# Altium PCB LKS_Motor_0331.PcbDoc (part 2 of 3)
Units mm, origin at the board's own origin, x right, y up, seen from the top; angles counter-clockwise.
Board outline 117 x 10 mm, 2 copper layers (Top Layer, Bottom Layer); 110 components, 71 nets, 323 pads, 187 vias.
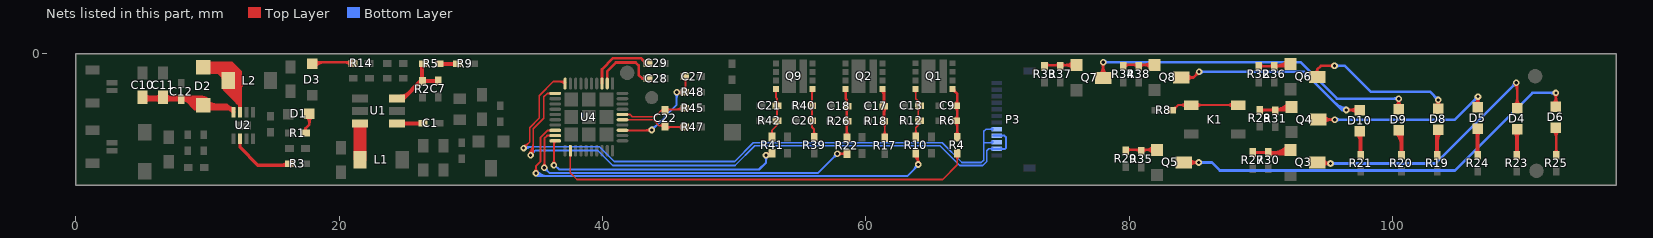
[diagram p2: the nets of this part, all layers, seen from the top]

## Via types
v1: diameter 0.5, hole 0.25, Top Layer to Bottom Layer, 185 vias
v2: diameter 0.7, hole 0.4, Top Layer to Bottom Layer, 2 vias

## Nets (pads, with @x,y where several pads share a name; then routed paths per layer and width w, separated by ;. In a path a pad name is that pad's centre, name@x,y a point inside that pad or via, vN(x,y) a via of type N, cw(c..) or ccw(c..) an arc to the next point about the centre after c; other vN are vias at no path point) (continued)
HO3: R4.2 U4.22 | length 33.5
  Top Layer w0.127: U4.22@37.527,-7.731 cw(c37.431,-7.827) 37.567,-7.827 cw(c37.703,-7.827) U4.22@37.607,-7.731 ; U4.22@37.567,-7.361 37.567,-9.043 38.075,-9.55 65.837,-9.55 66.953,-8.434 R4.2@66.953,-7.849 ; R4.2@66.818,-7.761 cw(c66.493,-8.086) 66.953,-8.086 cw(c67.413,-8.086) R4.2@67.088,-7.761
  Top Layer w0.15: R4.2@66.953,-7.849 R4.2@66.953,-7.626
LH_OUT_01: P3.8 P3.10 U4.10 | length 50.4
  Top Layer w0.127: v1(34.011,-7.163) 34.468,-6.706 34.468,-5.613 35.204,-4.877 35.204,-3.175 36.271,-2.108 U4.10@37.167,-2.108 ; v1@34.011,-6.976 ccw(c34.011,-6.526) 34.329,-6.844 ccw(c34.647,-7.163) v1@34.197,-7.163 ; 36.663,-2.108 cw(c36.663,-2.765) U4.10@37.127,-2.301 ; 36.969,-2.108 cw(c36.969,-2.458) U4.10@37.217,-2.211
  Bottom Layer w0.127: v1(34.011,-7.163) 34.108,-7.065 39.78,-7.065 40.894,-8.179 50.038,-8.179 51.46,-6.756 65.811,-6.756 67.31,-8.255 68.783,-8.255 68.961,-8.077 68.961,-6.756 ; v1@34.053,-7.205 cw(c34.39,-7.542) 34.39,-7.065 ; v1@34.142,-7.295 cw(c34.697,-7.849) 34.697,-7.065 ; 69.381,-6.756 ccw(c69.381,-6.392) P3.10@69.638,-6.65 ; P3.8@69.638,-5.793 ccw(c69.465,-5.967) 69.465,-5.722 ccw(c69.465,-5.476) P3.8@69.638,-5.65 ; P3.10@69.647,-6.722 69.612,-6.756 68.961,-6.756 ; P3.8@69.647,-5.722 69.132,-5.722 68.961,-5.893 68.961,-6.756
LH_OUT_02: P3.9 P3.11 U4.11 | length 50.5
  Top Layer w0.127: v1@34.412,-7.564 ccw(c33.634,-6.786) 34.734,-6.786 ; v1@34.502,-7.654 ccw(c33.94,-7.093) 34.734,-7.093 ; v1(34.544,-7.696) 34.734,-7.506 34.734,-5.702 35.547,-4.889 35.547,-3.264 35.801,-3.011 U4.11@36.417,-3.011 ; v1@34.592,-7.744 ccw(c34.247,-7.399) 34.734,-7.399 ; U4.11@36.047,-3.051 ccw(c35.951,-3.147) 35.951,-3.011 ccw(c35.951,-2.874) U4.11@36.047,-2.971
  Bottom Layer w0.127: v1(34.544,-7.696) 34.9,-7.341 39.649,-7.341 40.792,-8.484 50.063,-8.484 51.562,-6.985 65.634,-6.985 67.132,-8.484 68.885,-8.484 69.19,-8.179 69.19,-7.374 69.342,-7.222 P3.11@69.647,-7.222 ; v1@34.544,-7.51 ccw(c34.544,-7.059) 34.862,-7.378 ccw(c35.181,-7.696) v1@34.73,-7.696 ; P3.11@69.638,-7.293 ccw(c69.465,-7.467) 69.465,-7.222 ccw(c69.465,-6.976) P3.11@69.638,-7.15
  Bottom Layer w0.15: P3.11@69.647,-7.222 P3.11@69.952,-7.222 70.579,-7.222 70.637,-7.163 70.637,-6.325 70.534,-6.222 P3.9@69.952,-6.222 P3.9@69.647,-6.222 ; P3.11@70.257,-7.285 cw(c70.41,-7.439) 70.41,-7.222 cw(c70.41,-7.004) P3.11@70.257,-7.158 ; P3.9@70.257,-6.285 cw(c70.41,-6.439) 70.41,-6.222 cw(c70.41,-6.004) P3.9@70.257,-6.158
LO1: R41.2 U4.20 | length 22.4
  Top Layer w0.15: v1@36.192,-8.341 ccw(c35.893,-8.042) 36.315,-8.042 ccw(c36.738,-8.042) v1@36.439,-8.341 ; v1(36.315,-8.465) 36.315,-6.712 U4.20@36.417,-6.611 ; 36.315,-6.965 cw(c36.771,-6.965) U4.20@36.449,-6.642 ; v1@52.549,-7.82 cw(c52.848,-8.119) 52.848,-7.696 cw(c52.848,-7.274) v1@52.549,-7.572 ; R41.2@52.635,-7.696 cw(c52.635,-7.868) R41.2@52.756,-7.747 ; R41.2@52.73,-7.526 cw(c52.426,-7.338) v1(52.426,-7.696) R41.2@53.01,-7.696
  Bottom Layer w0.15: v1(36.315,-8.465) 36.379,-8.465 36.703,-8.788 51.892,-8.788 52.426,-8.255 v1(52.426,-7.696) ; v1@52.302,-7.82 cw(c52.003,-8.119) 52.426,-8.119 cw(c52.848,-8.119) v1@52.549,-7.82
LO2: R22.2 U4.19 | length 30.2
  Top Layer w0.15: v1@35.462,-8.538 ccw(c35.163,-8.239) 35.585,-8.239 ccw(c36.008,-8.239) v1@35.709,-8.538 ; v1(35.585,-8.661) 35.585,-6.426 35.801,-6.211 U4.19@36.417,-6.211 ; v1(57.836,-7.595) 58.561,-7.595 R22.2@58.571,-7.585 ; v1@57.96,-7.718 cw(c58.258,-8.017) 58.258,-7.595 cw(c58.258,-7.172) v1@57.96,-7.471 ; 58.115,-7.595 ccw(c58.115,-7.129) R22.2@58.444,-7.458 ; 58.162,-7.595 cw(c58.162,-7.993) R22.2@58.444,-7.711
  Bottom Layer w0.15: v1@35.585,-8.836 cw(c35.585,-9.259) 35.884,-8.96 cw(c36.183,-8.661) v1@35.76,-8.661 ; v1(35.585,-8.661) 35.966,-9.042 56.388,-9.042 v1(57.836,-7.595) ; v1@57.661,-7.595 cw(c57.238,-7.595) 57.537,-7.893 cw(c57.836,-8.192) v1@57.836,-7.77
LO3: R10.2 U4.18 | length 40.4
  Top Layer w0.15: v1@34.827,-8.944 ccw(c34.528,-8.645) 34.95,-8.645 ccw(c35.373,-8.645) v1@35.074,-8.944 ; v1@34.925,-9.042 v1(34.95,-9.068) 34.95,-8.534 35.306,-8.179 35.306,-7.239 ; 35.306,-7.772 35.306,-7.239 ; U4.18@36.417,-5.811 35.839,-5.811 35.306,-6.344 35.306,-7.239 ; R10.2@63.684,-7.752 cw(c63.07,-8.427) v1@63.983,-8.427 ; R10.2@63.785,-7.641 cw(c63.379,-8.088) 63.983,-8.088 ; v1@63.859,-8.284 ccw(c63.56,-7.985) 63.983,-7.985 ccw(c64.405,-7.985) v1@64.106,-8.284 ; v1(63.983,-8.407) R10.2@63.983,-7.544
  Bottom Layer w0.15: v1@34.862,-9.156 ccw(c35.201,-8.818) 35.201,-9.296 ; v1(34.95,-9.068) 34.95,-9.093 35.154,-9.296 63.144,-9.296 63.983,-8.458 v1(63.983,-8.407) ; v1@34.968,-9.05 ccw(c35.563,-8.456) 35.563,-9.296 ; v1@35.074,-8.944 ccw(c35.925,-8.093) 35.925,-9.296 ; 63.648,-8.793 ccw(c63.262,-8.407) v1@63.808,-8.407 ; 63.771,-8.67 cw(c63.983,-8.882) v1@63.983,-8.582
NetC1_2: C1.2 U1.1 | length 2.9
  Top Layer w0.3: U1.1@24.311,-5.293 U1.1@24.387,-5.293 C1.2@26.38,-5.293 ; U1.1@24.793,-5.399 cw(c25.049,-5.656) 25.049,-5.293 cw(c25.049,-4.931) U1.1@24.793,-5.187 ; 26.013,-5.293 ccw(c26.013,-5.007) C1.2@26.215,-5.21
NetC7_1: C7.1 R2.2 R5.1 U1.3 | length 7.3
  Top Layer w0.3: U1.3@24.311,-3.393 24.877,-3.393 26.187,-2.083 R2.2@26.34,-2.083 ; U1.3@24.687,-3.243 ccw(c24.687,-2.423) 25.267,-3.003 ; 25.772,-2.498 cw(c26.34,-3.066) R2.2@26.34,-2.263 ; 26.289,-1.633 ccw(c26.714,-1.633) R2.2@26.413,-1.933 ; 26.289,-1.074 cw(c26.627,-1.074) R5.1@26.388,-0.836 ; R5.1@26.289,-0.762 26.289,-2.032 R2.2@26.34,-2.083 ; R2.2@26.413,-2.156 cw(c26.652,-2.395) 26.652,-2.057 ; C7.1@27.534,-2.057 26.365,-2.057 R2.2@26.34,-2.083
NetC9_2: C9.2 Q1.1 R4.1 R6.1 | length 7.2
  Top Layer w0.2: Q1.1@66.577,-2.672 66.953,-3.048 R4.1@66.953,-6.331 ; Q1.1@66.589,-2.788 cw(c66.589,-3.037) Q1.1@66.765,-2.861 ; Q1.1@66.705,-2.672 ccw(c67.016,-2.672) 66.796,-2.891 ; R6.1@66.798,-5.195 cw(c66.424,-5.569) 66.953,-5.569 ; R6.1@66.798,-4.977 ccw(c66.424,-4.603) 66.953,-4.603 ; C9.2@66.798,-4.052 cw(c66.424,-4.426) 66.953,-4.426 ; C9.2@66.798,-3.834 ccw(c66.424,-3.46) 66.953,-3.46 ; R4.1@66.844,-6.146 ccw(c66.581,-5.883) 66.953,-5.883 ccw(c67.325,-5.883) R4.1@67.062,-6.146 ; R4.1@66.877,-6.356 R4.1@66.877,-6.331 ; 66.953,-5.347 cw(c67.168,-5.347) R6.1@67.016,-5.195 ; 66.953,-4.826 ccw(c67.168,-4.826) R6.1@67.016,-4.977 ; 66.953,-4.204 cw(c67.168,-4.204) C9.2@67.016,-4.052 ; 66.953,-3.683 ccw(c67.168,-3.683) C9.2@67.016,-3.834
NetC10_2: C10.2 C11.2 C12.2 D2.2 U2.4 | length 30.2
  Top Layer w0.3: C10.2@5.243,-3.605 cw(c5.546,-3.907) 5.546,-3.48 ; C10.2@5.243,-3.278 ccw(c5.73,-2.792) 5.73,-3.48 ; C10.2@5.243,-3.151 ccw(c5.638,-2.757) 5.638,-3.315 ccw(c5.638,-3.872) 5.243,-3.478 5.245,-3.48 8.407,-3.48 9.07,-4.142 11.682,-4.142 ; C10.2@5.258,-3.315 6.833,-3.315 9.383,-3.315 9.976,-3.908 11.448,-3.908 11.682,-4.142 ; 5.98,-3.48 ccw(c5.98,-2.792) C11.2@6.466,-3.278 ; 6.164,-3.48 cw(c6.164,-3.907) C11.2@6.466,-3.605 ; C11.2@6.466,-3.478 ccw(c6.072,-3.872) 6.072,-3.315 ccw(c6.072,-2.757) C11.2@6.466,-3.151 ; C11.2@6.793,-3.605 cw(c7.095,-3.907) 7.095,-3.48 ; C11.2@6.793,-3.478 cw(c7.187,-3.872) 7.187,-3.315 cw(c7.187,-2.757) C11.2@6.793,-3.151 ; C11.2@6.793,-3.278 ccw(c7.279,-2.792) 7.279,-3.48 ; 7.299,-3.315 cw(c7.299,-6.306) D2.2@9.414,-4.191 ; 7.535,-3.315 cw(c7.535,-3.869) C12.2@7.927,-3.477 ; C12.2@8.023,-3.315 cw(c8.023,-5.581) D2.2@9.626,-3.979 ; C12.2@8.075,-3.477 cw(c8.467,-3.869) 8.467,-3.315 ; 8.748,-3.315 cw(c8.748,-4.857) D2.2@9.838,-3.766 ; 9.472,-3.315 cw(c9.472,-4.133) D2.2@10.05,-3.554 ; D2.2@9.767,-3.837 ccw(c10.504,-3.101) 10.504,-4.142 ; D2.2@9.98,-4.191 cw(c10.662,-4.874) 10.662,-3.908 cw(c10.662,-2.942) 9.98,-3.625 ccw(c11.228,-2.376) 11.228,-4.142 ; 11.573,-4.033 ccw(c11.944,-3.662) U2.4@11.975,-4.186 ; U2.4@11.975,-4.436 11.682,-4.142
NetC13_2: C13.2 Q1.8 R10.1 R12.1 | length 7.4
  Top Layer w0.127: R10.1@63.67,-6.114 ccw(c63.345,-5.788) 63.805,-5.788 ccw(c64.265,-5.788) R10.1@63.94,-6.114 ; Q1.8@63.685,-2.779 cw(c63.425,-3.04) 63.793,-3.04 cw(c64.161,-3.04) Q1.8@63.901,-2.779 ; Q1.8@63.793,-2.672 63.793,-3.417 63.983,-3.607 ; R10.1@63.805,-6.325 63.805,-5.613 63.983,-5.436 ; R12.1@63.873,-4.952 ccw(c63.609,-4.688) 63.983,-4.688 ; C13.2@63.873,-4.078 cw(c63.609,-4.342) 63.983,-4.342 ; R12.1@63.887,-5.233 cw(c63.719,-5.437) 63.983,-5.437 ; C13.2@63.891,-3.793 ccw(c63.748,-3.607) 63.983,-3.607 ; 63.983,-4.565 ccw(c64.529,-4.565) R12.1@64.143,-4.952 ; 63.983,-4.464 cw(c64.529,-4.464) C13.2@64.143,-4.078 ; C13.2@64.087,-3.77 cw(c64.162,-3.607) 63.983,-3.607 ; R12.1@64.094,-5.256 ccw(c64.184,-5.437) 63.983,-5.437 ; 63.983,-5.436 63.983,-3.607
NetC17_2: C17.2 Q2.1 R17.1 R18.1 | length 12.8
  Top Layer w0.15: Q2.1@61.176,-2.781 cw(c60.533,-3.424) 61.443,-3.424 ; Q2.1@61.282,-2.675 cw(c60.895,-3.061) 61.443,-3.061 ; R18.1@61.314,-5.248 cw(c61.005,-5.557) 61.443,-5.557 ; R18.1@61.314,-4.994 ccw(c61.005,-4.685) 61.443,-4.685 ; C17.2@61.314,-4.105 cw(c61.005,-4.414) 61.443,-4.414 ; C17.2@61.314,-3.851 ccw(c61.005,-3.542) 61.443,-3.542 ; R17.1@61.316,-6.163 ccw(c61.01,-5.857) 61.443,-5.857 ccw(c61.875,-5.857) R17.1@61.569,-6.163 ; R17.1@61.443,-6.416 Q2.1@61.443,-2.86 ; 61.443,-5.549 cw(c61.869,-5.549) R18.1@61.568,-5.248 ; 61.443,-4.693 ccw(c61.869,-4.693) R18.1@61.568,-4.994 ; 61.443,-4.406 cw(c61.869,-4.406) C17.2@61.568,-4.105 ; 61.443,-3.55 ccw(c61.869,-3.55) C17.2@61.568,-3.851
  Top Layer w0.2: Q2.1@61.194,-2.763 cw(c60.781,-3.175) 61.365,-3.175 ; R18.1@61.256,-5.012 ccw(c60.993,-4.749) 61.365,-4.749 ccw(c61.737,-4.749) R18.1@61.474,-5.012 ; C17.2@61.256,-4.087 cw(c60.993,-4.35) 61.365,-4.35 cw(c61.737,-4.35) C17.2@61.474,-4.087 ; C17.2@61.256,-3.869 ccw(c60.993,-3.606) 61.365,-3.606 ccw(c61.737,-3.606) C17.2@61.474,-3.869 ; Q2.1@61.263,-2.681 61.365,-2.783 R18.1@61.365,-5.146
NetC18_2: C18.2 Q2.8 R22.1 R26.1 | length 7.1
  Top Layer w0.2: Q2.8@58.398,-2.763 cw(c58.2,-2.961) 58.48,-2.961 cw(c58.76,-2.961) Q2.8@58.562,-2.763 ; R22.1@58.462,-6.18 ccw(c58.199,-5.918) 58.571,-5.918 ccw(c58.943,-5.918) R22.1@58.68,-6.18 ; R26.1@58.462,-5.23 cw(c58.199,-5.493) 58.571,-5.493 cw(c58.943,-5.493) R26.1@58.68,-5.23 ; R26.1@58.462,-5.012 ccw(c58.199,-4.749) 58.571,-4.749 ccw(c58.943,-4.749) R26.1@58.68,-5.012 ; C18.2@58.462,-4.087 cw(c58.199,-4.35) 58.571,-4.35 cw(c58.943,-4.35) C18.2@58.68,-4.087 ; C18.2@58.462,-3.869 ccw(c58.199,-3.606) 58.571,-3.606 ccw(c58.943,-3.606) C18.2@58.68,-3.869 ; Q2.8@58.48,-2.681 58.48,-3.413 58.571,-3.504 C18.2@58.571,-3.978 R22.1@58.571,-6.416
NetC20_2: C20.2 Q9.1 R39.1 R40.1 | length 7.8
  Top Layer w0.15: C20.2@55.777,-5.222 cw(c55.472,-5.528) 55.904,-5.528 cw(c56.336,-5.528) C20.2@56.03,-5.222 ; C20.2@55.777,-4.969 ccw(c55.472,-4.663) 55.904,-4.663 ccw(c56.336,-4.663) C20.2@56.03,-4.969 ; R40.1@55.777,-4.079 cw(c55.472,-4.385) 55.904,-4.385 cw(c56.336,-4.385) R40.1@56.03,-4.079 ; R40.1@55.777,-3.826 ccw(c55.472,-3.52) 55.904,-3.52 ccw(c56.336,-3.52) R40.1@56.03,-3.826 ; Q9.1@55.842,-2.781 cw(c55.694,-2.929) 55.904,-2.929 ; 55.904,-3.113 cw(c56.374,-3.113) Q9.1@56.042,-2.781 ; R39.1@55.955,-6.137 ccw(c55.711,-5.893) 56.056,-5.893 ; Q9.1@55.955,-2.681 55.904,-2.732 55.904,-5.146 55.904,-5.561 56.056,-5.713 R39.1@56.056,-6.442 ; 56.056,-5.77 ccw(c56.575,-5.77) R39.1@56.208,-6.137
NetC21_2: C21.2 Q9.8 R41.1 R42.1 | length 7.5
  Top Layer w0.127: R41.1@52.754,-6.108 ccw(c52.485,-5.815) 52.883,-5.815 ; R41.1@52.883,-6.325 52.883,-5.815 ; R41.1@53.012,-6.108 cw(c53.281,-5.815) 52.883,-5.815 ; R42.1@53.163,-5.258 cw(c53.054,-5.436) 53.262,-5.436 ; R42.1@53.262,-5.004 53.262,-5.436 ; R42.1@53.362,-5.258 ccw(c53.47,-5.436) 53.262,-5.436 ; 52.883,-5.815 53.262,-5.436
  Top Layer w0.15: Q9.8@53.072,-2.781 cw(c52.831,-3.021) 53.171,-3.021 cw(c53.511,-3.021) Q9.8@53.271,-2.781 ; R42.1@53.136,-4.969 ccw(c52.83,-4.663) 53.262,-4.663 ccw(c53.694,-4.663) R42.1@53.389,-4.969 ; C21.2@53.136,-4.079 cw(c52.83,-4.385) 53.262,-4.385 cw(c53.694,-4.385) C21.2@53.389,-4.079 ; C21.2@53.136,-3.826 ccw(c52.83,-3.52) 53.262,-3.52 ccw(c53.694,-3.52) C21.2@53.389,-3.826 ; Q9.8@53.171,-2.681 53.171,-3.311 53.262,-3.402 53.262,-3.978 R42.1@53.262,-5.004
NetC28_1: C28.1 U4.2 | length 5.8
  Top Layer w0.2: U4.2@40.367,-2.261 40.367,-1.314 41.021,-0.66 42.52,-0.66 42.748,-0.889 42.748,-1.6 43.028,-1.88 ; C28.1@43.271,-1.985 ccw(c43.028,-2.213) 43.028,-1.88 ; C28.1@43.271,-1.774 cw(c43.028,-1.546) 43.028,-1.88 ; C28.1@43.459,-1.88 43.028,-1.88
NetC29_2: C29.2 U4.3 | length 5.6
  Top Layer w0.2: U4.3@39.967,-2.261 39.967,-1.181 40.818,-0.33 42.926,-0.33 C29.2@43.383,-0.787 ; 43.034,-0.438 ccw(c43.383,-0.088) C29.2@43.383,-0.583 ; C29.2@43.156,-0.56 cw(c42.98,-0.737) C29.2@43.229,-0.737
NetD1_2: D1.2 R1.2 | length 3.3
  Top Layer w0.2: R1.2@17.344,-5.907 ccw(c17.116,-5.664) 17.45,-5.664 ; R1.2@17.45,-6.121 17.45,-5.664 ; D1.2@17.529,-4.781 cw(c17.017,-5.293) 17.741,-5.293 cw(c18.466,-5.293) D1.2@17.953,-4.781 ; R1.2@17.555,-5.907 cw(c17.783,-5.664) 17.45,-5.664 ; D1.2@17.741,-4.619 17.741,-5.373 17.45,-5.664
NetD2_1: D2.1 L2.1 U2.3 | length 51.7
  Top Layer w0.254: D2.1@9.976,-1.007 10.736,-1.007 11.76,-2.032 11.76,-3.146 11.864,-3.249 ; D2.1@9.996,-1.306 cw(c10.718,-2.028) 10.718,-1.007 cw(c10.718,0.014) D2.1@9.996,-0.708 ; 10.926,-1.198 cw(c10.242,-1.882) L2.1@11.21,-1.882 ; 10.993,-1.265 ccw(c11.583,-0.676) L2.1@11.583,-1.509 ; L2.1@11.2,-1.472 11.256,-1.528 11.256,-2.642 11.864,-3.249 ; L2.1@11.389,-2.501 cw(c10.986,-3.162) 11.76,-3.162 ; L2.1@11.521,-2.284 cw(c11.261,-2.71) 11.76,-2.71 ; L2.1@11.76,-2.653 cw(c12.054,-2.653) L2.1@11.846,-2.446 ; 12.04,-3.425 11.864,-3.249
  Top Layer w0.3: D2.1@9.767,-1.078 cw(c10.591,-1.902) 10.591,-0.737 ; D2.1@9.767,-0.936 ccw(c10.45,-0.254) 10.45,-1.219 ; D2.1@9.79,-0.97 ccw(c10.379,-0.738) 10.379,-1.372 ; D2.1@10.069,-0.86 ccw(c10.82,-0.564) 10.82,-1.372 ; 10.622,-0.991 cw(c10.622,-0.082) 9.98,-0.724 ccw(c11.174,0.47) 11.174,-1.219 ; 10.703,-0.991 ccw(c10.703,-2.013) 9.98,-1.29 cw(c11.316,-2.626) 11.316,-0.737 ; 10.946,-1.498 ccw(c11.234,-1.209) L2.1@11.422,-1.571 ; L2.1@11.335,-2.429 cw(c10.922,-2.843) 11.506,-2.843 ; L2.1@11.481,-1.954 cw(c11.753,-2.564) 12.226,-2.091 ; 11.506,-2.896 cw(c11.967,-2.896) L2.1@11.748,-2.49 ; L2.1@11.557,-2.531 cw(c11.518,-3.051) 12.04,-3.051 ; L2.1@11.579,-2.232 cw(c11.542,-2.728) 12.04,-2.728 ; L2.1@11.587,-2.232 cw(c11.645,-2.984) 12.179,-2.451 ; L2.1@11.595,-2.23 cw(c11.728,-2.73) 12.093,-2.364 ; L2.1@11.601,-1.933 cw(c11.566,-2.405) L2.1@12.04,-2.405 ; L2.1@11.603,-2.228 cw(c11.944,-2.99) 12.534,-2.4 ; L2.1@11.891,-2.197 cw(c12.167,-2.344) 12.167,-2.032 ; L2.1@11.891,-1.867 ccw(c12.167,-1.72) 12.167,-2.032 ; D2.1@9.976,-1.007 10.247,-0.737 11.836,-0.737 12.475,-1.376 12.475,-2.057 ; D2.1@9.976,-1.007 10.341,-1.372 10.82,-1.372 ; D2.1@9.976,-1.007 10.188,-1.219 11.963,-1.219 ; D2.1@9.976,-1.007 9.993,-0.991 11.735,-0.991 11.963,-1.219 ; 10.82,-1.372 11.481,-2.032 L2.1@11.76,-2.032 ; 10.82,-1.372 12.116,-1.372 ; L2.1@11.76,-2.032 11.506,-2.286 11.506,-2.892 12.169,-3.554 ; L2.1@11.76,-2.032 12.167,-2.032 ; L2.1@11.76,-2.032 L2.1@12.04,-2.311 ; L2.1@11.76,-2.032 12.298,-2.569 12.298,-3.683 ; L2.1@11.76,-2.032 12.475,-2.747 U2.3@12.475,-4.436 12.475,-4.013 ; 11.963,-1.219 11.963,-2.235 L2.1@12.04,-2.311 ; 11.963,-1.219 12.116,-1.372 ; L2.1@12.04,-2.311 12.04,-2.921 12.04,-3.425 12.169,-3.554 ; 12.116,-1.372 12.268,-1.524 ; 12.167,-2.032 12.475,-2.341 ; 12.169,-3.554 12.298,-3.683 ; 12.268,-1.524 12.268,-2.134 12.475,-2.341 ; 12.268,-1.524 12.475,-1.731 12.475,-2.057 ; 12.298,-3.683 12.475,-3.861 12.475,-4.013 ; 12.475,-4.013 12.475,-2.341 ; 12.475,-2.341 12.475,-2.057
NetD3_2: D3.2 R14.1 | length 5.4
  Top Layer w0.2: D3.2@17.958,-0.629 20.949,-0.629 R14.1@21.057,-0.737 ; D3.2@18.029,-0.827 cw(c18.506,-1.304) 18.506,-0.629 ; D3.2@18.17,-0.968 cw(c18.989,-1.787) 18.989,-0.629 ; D3.2@18.17,-0.544 ccw(c18.375,-0.338) 18.375,-0.629 ; 20.348,-0.629 cw(c20.348,-1.369) R14.1@20.872,-0.845
NetD4_1: D4.1 R23.1 | length 2.9
  Top Layer w0.3: D4.1@109.301,-5.904 cw(c108.943,-6.261) 109.449,-6.261 ; R23.1@109.449,-7.696 D4.1@109.449,-5.756 ; 109.449,-6.4 cw(c110.151,-6.4) D4.1@109.654,-5.904
NetD4_2: D4.2 Q3.3 | length 24.8
  Top Layer w0.2: Q3.3@93.777,-8.357 95.326,-8.357 cw(c95.326,-7.672) Q3.3@94.759,-8.055 ; Q3.3@94.593,-8.167 ccw(c94.95,-7.926) 94.95,-8.357 ; Q3.3@94.715,-8.508 cw(c95.08,-8.872) v1@95.08,-8.357 ; Q3.3@94.877,-8.357 ccw(c94.877,-7.908) v1@95.195,-8.225 ; 95,-8.357 cw(c95,-8.632) v1@95.195,-8.437 ; D4.2@109.258,-3.916 ccw(c108.746,-3.404) 109.471,-3.404 ccw(c110.195,-3.404) D4.2@109.683,-3.916 ; v1@109.292,-2.316 cw(c108.86,-2.748) 109.471,-2.748 ; D4.2@109.471,-4.128 v1@109.471,-2.283
  Bottom Layer w0.2: v1(95.301,-8.331) 103.276,-8.331 v1(109.398,-2.21) ; v1@95.407,-8.437 cw(c95.663,-8.693) 95.663,-8.331 cw(c95.663,-7.969) v1@95.407,-8.225 ; v1@109.248,-2.21 cw(c108.886,-2.21) 109.142,-2.466 cw(c109.398,-2.722) v1@109.398,-2.36
NetD5_1: D5.1 R24.1 | length 3
  Top Layer w0.3: D5.1@106.303,-5.853 cw(c105.885,-6.272) 106.477,-6.272 ; R24.1@106.477,-7.696 D5.1@106.477,-5.68 ; 106.477,-6.288 cw(c107.092,-6.288) D5.1@106.657,-5.853
NetD5_2: D5.2 Q4.3 | length 18.5
  Top Layer w0.2: Q4.3@94.361,-5.004 v1(95.631,-5.004) ; Q4.3@94.791,-5.256 cw(c95.401,-5.866) 95.401,-5.004 cw(c95.401,-4.141) Q4.3@94.791,-4.751 ; v1@95.525,-5.11 ccw(c95.269,-5.366) 95.269,-5.004 ccw(c95.269,-4.642) v1@95.525,-4.898 ; D5.2@106.261,-3.865 ccw(c105.68,-3.283) v1@106.502,-3.283 ; v1@106.396,-3.357 cw(c106.14,-3.613) 106.502,-3.613 cw(c106.864,-3.613) v1@106.608,-3.357 ; D5.2@106.473,-4.077 106.502,-4.049 v1(106.502,-3.251) ; v1@106.502,-3.423 ccw(c107.128,-3.423) D5.2@106.686,-3.865
  Bottom Layer w0.2: v1(95.631,-5.004) 104.75,-5.004 v1(106.502,-3.251) ; v1@95.737,-5.11 cw(c95.993,-5.366) 95.993,-5.004 cw(c95.993,-4.642) v1@95.737,-4.898 ; v1@106.352,-3.251 cw(c105.99,-3.251) 106.246,-3.507 cw(c106.502,-3.763) v1@106.502,-3.401
NetD6_1: D6.1 R25.1 | length 3.8
  Top Layer w0.2: D6.1@112.212,-5.838 cw(c111.647,-6.403) 112.446,-6.403 ; R25.1@112.337,-7.511 ccw(c112.074,-7.248) 112.446,-7.248 ccw(c112.818,-7.248) R25.1@112.555,-7.511 ; D6.1@112.424,-5.625 112.446,-5.647 R25.1@112.446,-7.696 ; 112.446,-6.297 cw(c113.095,-6.297) D6.1@112.636,-5.838
NetD6_2: D6.2 Q5.3 | length 36.8
  Top Layer w0.2: Q5.3@84.15,-8.255 v1(85.293,-8.255) ; Q5.3@84.581,-8.508 cw(c85.19,-9.117) 85.19,-8.255 cw(c85.19,-7.393) Q5.3@84.581,-8.002 ; v1@85.187,-8.361 ccw(c84.931,-8.617) 84.931,-8.255 ccw(c84.931,-7.893) v1@85.187,-8.149 ; D6.2@112.205,-3.814 ccw(c111.693,-3.302) 112.417,-3.302 ccw(c113.141,-3.302) D6.2@112.629,-3.814 ; v1@112.314,-3.078 cw(c112.067,-3.326) 112.417,-3.326 ; D6.2@112.417,-4.027 112.417,-2.975 v1(112.42,-2.972) ; 112.417,-3.342 cw(c112.791,-3.342) v1@112.526,-3.078
  Bottom Layer w0.2: v1(85.293,-8.255) 86.284,-8.255 86.893,-8.865 104.75,-8.865 110.642,-2.972 v1(112.42,-2.972) ; v1@85.399,-8.361 cw(c85.655,-8.617) 85.655,-8.255 cw(c85.655,-7.893) v1@85.399,-8.149 ; v1@112.314,-3.078 ccw(c112.058,-3.334) 112.058,-2.972 ccw(c112.058,-2.61) v1@112.314,-2.866
NetD8_1: D8.1 R19.1 | length 2.8
  Top Layer w0.3: D8.1@103.306,-5.955 cw(c103.072,-6.189) 103.403,-6.189 ; R19.1@103.403,-7.696 D8.1@103.403,-5.857 ; 103.403,-6.574 cw(c104.279,-6.574) D8.1@103.66,-5.955
NetD8_2: D8.2 Q6.3 | length 15.1
  Top Layer w0.2: Q6.3@94.135,-1.428 ccw(c94.026,-1.194) 94.285,-1.194 ; Q6.3@94.285,-1.753 94.285,-1.194 ; Q6.3@94.435,-1.428 cw(c94.543,-1.194) 94.285,-1.194 ; v1@95.5,-1.02 ccw(c95.243,-1.277) 95.243,-0.914 ccw(c95.243,-0.552) v1@95.5,-0.808 ; v1(95.606,-0.914) 94.564,-0.914 94.285,-1.194 ; D8.2@103.314,-3.927 ccw(c103.122,-3.629) v1@103.476,-3.629 ; v1@103.374,-3.611 cw(c103.126,-3.859) D8.2@103.476,-3.859 ; D8.2@103.476,-4.179 v1@103.476,-3.629 ; D8.2@103.476,-3.876 cw(c103.85,-3.876) v1@103.586,-3.611 ; D8.2@103.639,-3.927 cw(c103.831,-3.629) v1@103.476,-3.629
  Bottom Layer w0.2: v1(95.606,-0.914) 96.393,-0.914 98.349,-2.87 102.845,-2.87 v1(103.48,-3.505) ; v1@95.712,-1.02 cw(c95.968,-1.277) 95.968,-0.914 cw(c95.968,-0.552) v1@95.712,-0.808 ; v1@103.33,-3.505 ccw(c102.967,-3.505) 103.224,-3.249 ccw(c103.48,-2.993) v1@103.48,-3.355
NetD9_1: D9.1 R20.1 | length 3.1
  Top Layer w0.3: D9.1@100.309,-5.98 cw(c99.4,-6.889) 100.686,-6.889 ; D9.1@100.521,-5.768 cw(c100.124,-6.165) D9.1@100.686,-6.165 ; R20.1@100.686,-7.696 D9.1@100.686,-6.003
NetD9_2: D9.2 Q7.3 | length 30.4
  Top Layer w0.2: Q7.3@77.776,-1.576 ccw(c77.166,-0.966) 78.029,-0.966 ccw(c78.891,-0.966) Q7.3@78.281,-1.576 ; v1@77.923,-0.741 cw(c77.667,-0.997) 78.029,-0.997 cw(c78.391,-0.997) v1@78.135,-0.741 ; Q7.3@78.029,-1.829 v1(78.029,-0.635) ; D9.2@100.267,-3.992 ccw(c99.746,-3.472) v1@100.482,-3.472 ; v1@100.376,-3.51 cw(c100.12,-3.766) 100.482,-3.766 cw(c100.845,-3.766) v1@100.588,-3.51 ; D9.2@100.479,-4.204 100.482,-4.201 v1(100.482,-3.404) ; v1@100.482,-3.488 ccw(c101.195,-3.488) D9.2@100.691,-3.992
  Bottom Layer w0.2: v1(78.029,-0.635) 93.015,-0.635 95.783,-3.404 v1(100.482,-3.404) ; v1@78.135,-0.741 cw(c78.391,-0.997) 78.391,-0.635 cw(c78.391,-0.273) v1@78.135,-0.529 ; v1@100.376,-3.51 ccw(c100.12,-3.766) 100.12,-3.404 ccw(c100.12,-3.041) v1@100.376,-3.298
NetD10_1: D10.1 R21.1 | length 2.7
  Top Layer w0.3: D10.1@97.337,-6.056 cw(c96.735,-6.659) 97.587,-6.659 ; R21.1@97.587,-7.696 D10.1@97.587,-5.952 ; 97.587,-6.307 cw(c97.942,-6.307) D10.1@97.691,-6.056
NetD10_2: D10.2 Q8.3 | length 20.2
  Top Layer w0.2: Q8.3@83.972,-1.803 84.887,-1.803 ; Q8.3@84.431,-2.025 cw(c84.887,-2.384) 84.887,-1.803 ; Q8.3@84.431,-1.582 ccw(c84.887,-1.223) 84.887,-1.803 ; v1@85.169,-1.372 cw(c84.806,-1.372) 85.063,-1.628 cw(c85.319,-1.884) v1@85.319,-1.522 ; v1(85.319,-1.372) 84.887,-1.803 ; v1(96.495,-4.267) 97.494,-4.267 D10.2@97.507,-4.281 ; v1@96.601,-4.373 cw(c96.857,-4.629) 96.857,-4.267 cw(c96.857,-3.905) v1@96.601,-4.161 ; 96.751,-4.267 cw(c96.751,-5.037) D10.2@97.295,-4.493 ; 96.815,-4.267 ccw(c96.815,-3.588) D10.2@97.295,-4.068
  Bottom Layer w0.2: v1(85.319,-1.372) 93.294,-1.372 96.19,-4.267 v1(96.495,-4.267) ; v1@85.425,-1.478 cw(c85.681,-1.734) 85.681,-1.372 cw(c85.681,-1.009) v1@85.425,-1.266 ; 95.718,-3.796 ccw(c96.495,-3.019) v1@96.495,-4.117 ; 96.06,-4.137 ccw(c96.495,-3.702) v1@96.495,-4.317
NetK1_1: K1.1 R8.1 | length 9
  Top Layer w0.15: R8.1@83.287,-4.343 83.73,-3.9 K1.1@84.725,-3.9 K1.1@88.275,-3.9 ; R8.1@83.312,-4.114 ccw(c83.312,-3.62) 83.661,-3.969 ; R8.1@83.491,-4.293 cw(c83.862,-4.293) 83.6,-4.03 ; K1.1@84.331,-4.095 ccw(c83.861,-4.564) 83.861,-3.9 ccw(c83.861,-3.236) K1.1@84.331,-3.706 ; K1.1@85.12,-4.095 cw(c85.589,-4.564) 85.589,-3.9 cw(c85.589,-3.236) K1.1@85.12,-3.706 ; K1.1@87.88,-4.095 ccw(c87.411,-4.564) 87.411,-3.9 ccw(c87.411,-3.236) K1.1@87.88,-3.706
NetL1_1: L1.1 U1.6 | length 20.7
  Top Layer w0.3: L1.1@21.257,-7.998 U1.6@21.257,-5.319 ; 21.257,-6.976 ccw(c22.516,-6.976) L1.1@21.626,-7.866 ; 21.257,-6.252 ccw(c23.24,-6.252) 21.838,-7.654 cw(c22.627,-6.865) 21.511,-6.865 ; 21.257,-5.728 cw(c21.722,-5.728) U1.6@21.393,-5.399 ; 21.511,-7.249 cw(c20.937,-7.249) L1.1@21.343,-7.654 ; 21.511,-5.839 cw(c22.133,-5.839) U1.6@21.693,-5.399 ; U1.6@21.511,-5.293 21.511,-7.972 L1.1@21.59,-8.052 ; L1.1@21.765,-7.947 U1.6@21.765,-5.268 ; 21.765,-7.36 cw(c21.048,-7.36) 21.555,-7.866 ccw(c20.68,-6.992) 21.917,-6.992 ; 21.765,-6.635 cw(c20.324,-6.635) L1.1@21.343,-7.654 ; 21.765,-5.951 cw(c22.544,-5.951) U1.6@21.993,-5.399 ; U1.6@21.781,-5.399 cw(c21.452,-5.728) 21.917,-5.728 ; L1.1@21.917,-8.074 U1.6@21.917,-5.395 ; 21.917,-6.267 cw(c19.956,-6.267) L1.1@21.343,-7.654
NetQ3_1: Q3.1 R27.1 R30.1 | length 13
  Top Layer w0.2: R27.1@89.383,-7.493 R30.1@90.576,-7.493 91.77,-7.493 ; R27.1@89.491,-7.602 cw(c89.754,-7.865) 89.754,-7.493 cw(c89.754,-7.121) R27.1@89.491,-7.384 ; R30.1@90.468,-7.602 ccw(c90.205,-7.865) 90.205,-7.493 ccw(c90.205,-7.121) R30.1@90.468,-7.384 ; R30.1@90.602,-7.62 91.237,-7.62 ; R30.1@90.685,-7.678 cw(c90.826,-7.818) R30.1@90.826,-7.62 ; R30.1@90.685,-7.602 cw(c90.948,-7.865) 90.948,-7.493 cw(c90.948,-7.121) R30.1@90.685,-7.384 ; R30.1@90.685,-7.46 ccw(c91.071,-7.075) 91.071,-7.62 ; 90.9,-7.493 ccw(c90.9,-5.937) Q3.1@92,-7.037 ; 91.383,-7.493 ccw(c91.383,-6.42) Q3.1@92.142,-7.179 ; 91.532,-7.62 ccw(c91.532,-7.001) Q3.1@92.107,-7.231 ; 91.636,-7.391 cw(c91.636,-7.907) Q3.1@92,-7.542 ; Q3.1@91.828,-7.62 ccw(c91.828,-7.12) Q3.1@92.293,-7.306 ; Q3.1@91.872,-7.391 91.745,-7.391 ; Q3.1@91.921,-7.157 cw(c91.237,-6.883) 91.237,-7.62 ; Q3.1@91.923,-7.62 91.237,-7.62 ; Q3.1@91.942,-7.114 cw(c91.465,-6.844) 91.465,-7.391 ; 91.237,-7.62 91.465,-7.391 ; 91.465,-7.391 91.745,-7.391 ; 91.745,-7.391 cw(c91.745,-7.667) 91.966,-7.503 ccw(c91.745,-7.667) 91.745,-7.391 ; 91.745,-7.391 ccw(c91.745,-7.238) 91.897,-7.254 cw(c91.745,-7.238) 91.745,-7.391
NetQ4_1: Q4.1 R28.1 R31.1 | length 6.8
  Top Layer w0.2: R28.1@89.84,-4.267 Q4.1@92.151,-4.267 ; R28.1@90.025,-4.401 cw(c90.349,-4.726) 90.349,-4.267 ; R28.1@90.025,-4.184 ccw(c90.226,-3.982) 90.226,-4.267 ; 90.677,-4.267 ccw(c90.677,-3.809) R31.1@91.001,-4.133 ; 90.799,-4.267 cw(c90.799,-4.552) R31.1@91.001,-4.351 ; R31.1@90.915,-4.267 ccw(c90.915,-2.624) Q4.1@92.076,-3.786 ; R31.1@91.219,-4.351 cw(c91.42,-4.552) 91.42,-4.267 ; R31.1@91.219,-4.133 ccw(c91.543,-3.809) 91.543,-4.267 ; 91.398,-4.267 ccw(c91.398,-3.107) Q4.1@92.218,-3.927 ; Q4.1@91.88,-4.267 ccw(c91.88,-3.59) Q4.1@92.359,-4.069
NetQ5_1: Q5.1 R29.1 R35.1 | length 5.5
  Top Layer w0.2: R29.1@79.731,-7.366 79.807,-7.29 Q5.1@82.118,-7.29 ; R29.1@79.865,-7.399 cw(c80.128,-7.662) 80.128,-7.29 cw(c80.128,-6.918) R29.1@79.865,-7.181 ; 80.491,-7.29 cw(c80.491,-7.748) R35.1@80.816,-7.424 ; 80.614,-7.29 ccw(c80.614,-7.005) R35.1@80.816,-7.206 ; R35.1@81.033,-7.424 cw(c81.358,-7.748) 81.358,-7.29 ; R35.1@81.033,-7.206 ccw(c81.235,-7.005) 81.235,-7.29 ; Q5.1@81.866,-7.542 ccw(c81.256,-8.152) 81.256,-7.29 ccw(c81.256,-6.427) Q5.1@81.866,-7.037
NetQ6_1: Q6.1 R32.1 R36.1 | length 6.3
  Top Layer w0.2: R32.1@89.84,-0.94 R36.1@91.034,-0.94 ; R32.1@89.949,-1.049 cw(c90.212,-1.312) 90.212,-0.94 cw(c90.212,-0.568) R32.1@89.949,-0.831 ; R36.1@90.925,-1.049 ccw(c90.662,-1.312) 90.662,-0.94 ccw(c90.662,-0.568) R36.1@90.925,-0.831 ; R36.1@91.142,-1.049 cw(c91.405,-1.312) 91.405,-0.94 cw(c91.405,-0.568) R36.1@91.142,-0.831 ; 91.512,-0.94 ccw(c91.512,-0.056) Q6.1@92.141,-0.677 ; 91.758,-0.94 cw(c91.758,-1.282) Q6.1@92,-1.04 ; Q6.1@91.999,-0.536 cw(c91.034,0.416) R36.1@91.034,-0.94 ; Q6.1@92.253,-0.787 92.1,-0.94 R36.1@91.034,-0.94
NetQ7_1: Q7.1 R33.1 R37.1 | length 5.6
  Top Layer w0.2: R33.1@73.558,-0.94 73.635,-0.864 Q7.1@75.997,-0.864 ; R33.1@73.693,-0.972 cw(c73.956,-1.235) 73.956,-0.864 cw(c73.956,-0.492) R33.1@73.693,-0.755 ; R37.1@74.669,-0.972 ccw(c74.406,-1.235) 74.406,-0.864 ccw(c74.406,-0.492) R37.1@74.669,-0.755 ; R37.1@74.886,-0.972 cw(c75.149,-1.235) 75.149,-0.864 cw(c75.149,-0.492) R37.1@74.886,-0.755 ; Q7.1@75.744,-1.116 ccw(c75.134,-1.726) 75.134,-0.864 ccw(c75.134,-0.001) Q7.1@75.744,-0.611
NetQ8_1: Q8.1 R34.1 R38.1 | length 5.6
  Top Layer w0.2: R34.1@79.527,-0.94 79.629,-0.838 Q8.1@81.94,-0.838 ; R34.1@79.662,-0.972 cw(c79.986,-1.297) 79.986,-0.838 ; R34.1@79.662,-0.755 ccw(c79.863,-0.553) 79.863,-0.838 ; 80.313,-0.838 cw(c80.313,-1.297) R38.1@80.638,-0.972 ; 80.436,-0.838 ccw(c80.436,-0.553) R38.1@80.638,-0.755 ; R38.1@80.855,-0.972 cw(c81.18,-1.297) 81.18,-0.838 ; R38.1@80.855,-0.755 ccw(c81.057,-0.553) 81.057,-0.838 ; Q8.1@81.688,-1.091 ccw(c81.078,-1.701) 81.078,-0.838 ccw(c81.078,0.024) Q8.1@81.688,-0.586
NetR3_1: R3.1 U2.6 | length 5.5
  Top Layer w0.254: U2.6@12.475,-6.436 12.475,-7.116 13.818,-8.458 R3.1@16.231,-8.458 ; 15.603,-8.458 ccw(c15.603,-7.805) R3.1@16.065,-8.267
NetR5_2: R5.2 R9.1 | length 1.4
  Top Layer w0.3: R5.2@27.508,-0.762 R9.1@28.905,-0.762
OC: C27.2 R48.2 U4.33 | length 12.8
  Top Layer w0.15: U4.33@41.517,-5.811 43.77,-5.811 v1@43.84,-5.74 ; 43.269,-5.811 ccw(c43.269,-5.322) v1@43.615,-5.667 ; 43.363,-5.811 cw(c43.363,-6.167) v1@43.615,-5.915 ; v1(45.644,-2.921) R48.2@46.457,-2.921 ; v1@45.768,-3.045 cw(c46.066,-3.343) 46.066,-2.921 cw(c46.066,-2.499) v1@45.768,-2.797 ; R48.2@46.051,-3.048 ccw(c45.745,-3.353) 45.745,-2.921 ccw(c45.745,-2.489) R48.2@46.051,-2.794 ; R48.2@46.203,-2.794 ccw(c45.959,-2.55) 46.304,-2.55 ; C27.2@46.203,-1.854 cw(c45.959,-2.098) 46.304,-2.098 ; R48.2@46.304,-2.972 C27.2@46.304,-1.727 ; 46.304,-2.428 ccw(c46.823,-2.428) R48.2@46.456,-2.794 ; 46.304,-2.221 cw(c46.823,-2.221) C27.2@46.456,-1.854
  Bottom Layer w0.15: v1(43.739,-5.791) 45.644,-3.886 v1(45.644,-2.921) ; v1@43.739,-5.616 ccw(c43.739,-5.194) 44.038,-5.492 ccw(c44.336,-5.791) v1@43.914,-5.791 ; v1@43.84,-5.74 v1@43.866,-5.74 ; v1@45.52,-3.045 cw(c45.221,-3.343) 45.644,-3.343 cw(c46.066,-3.343) v1@45.768,-3.045
OPA0_IN: C22.1 R47.2 U4.35 | length 7.4
  Top Layer w0.127: U4.35@41.517,-5.011 42.298,-5.011 43.847,-5.011 44.12,-5.283 ; U4.35@41.887,-5.051 cw(c41.983,-5.147) 41.983,-5.011 cw(c41.983,-4.874) U4.35@41.887,-4.971 ; 44.356,-5.461 cw(c44.356,-5.834) C22.1@44.62,-5.57 ; C22.1@44.608,-5.315 cw(c44.298,-5.059) 44.298,-5.461 ; C22.1@44.755,-5.461 44.298,-5.461 ; 44.12,-5.283 44.298,-5.461 ; 44.12,-5.283 44.298,-5.461
  Top Layer w0.15: C22.1@44.755,-5.563 R47.2@46.253,-5.563 ; C22.1@44.881,-5.715 cw(c45.248,-6.081) 45.248,-5.563 ; C22.1@44.881,-5.461 ccw(c45.126,-5.217) 45.126,-5.563 ; R47.2@46.051,-5.689 ccw(c45.745,-5.995) 45.745,-5.563 ccw(c45.745,-5.13) R47.2@46.051,-5.436
OPA0_IP: C22.2 R45.2 U4.36 | length 7.6
  Top Layer w0.127: U4.36@41.517,-4.611 42.101,-4.611 42.266,-4.775 43.993,-4.775 44.348,-4.42 44.526,-4.242 C22.2@44.831,-4.242 ; U4.36@41.887,-4.651 cw(c41.983,-4.747) 41.983,-4.611 cw(c41.983,-4.474) U4.36@41.887,-4.571 ; 44.404,-4.364 cw(c44.628,-4.588) C22.2@44.787,-4.314 ; C22.2@44.521,-4.247 cw(c44.714,-4.44) C22.2@44.85,-4.204
  Top Layer w0.15: C22.2@44.831,-4.242 R45.2@46.101,-4.242 ; C22.2@44.881,-4.343 cw(c45.126,-4.587) 45.126,-4.242 ; C22.2@44.881,-4.09 ccw(c45.248,-3.723) 45.248,-4.242 ; 45.5,-4.242 ccw(c45.5,-3.463) R45.2@46.051,-4.014 ; 45.862,-4.242 ccw(c45.862,-3.825) R45.2@46.157,-4.12 ; R45.2@46.443,-4.204 R45.2@46.507,-4.14